# Altium PCB ITCoffeeOne_Lite_V4.02.PcbDoc
Units mm, origin at the board's own origin, x right, y up, seen from the top; angles counter-clockwise.
Board outline 45 x 100 mm, 2 copper layers (Top, Bottom); 43 components, 45 nets, 146 pads, 19 vias.
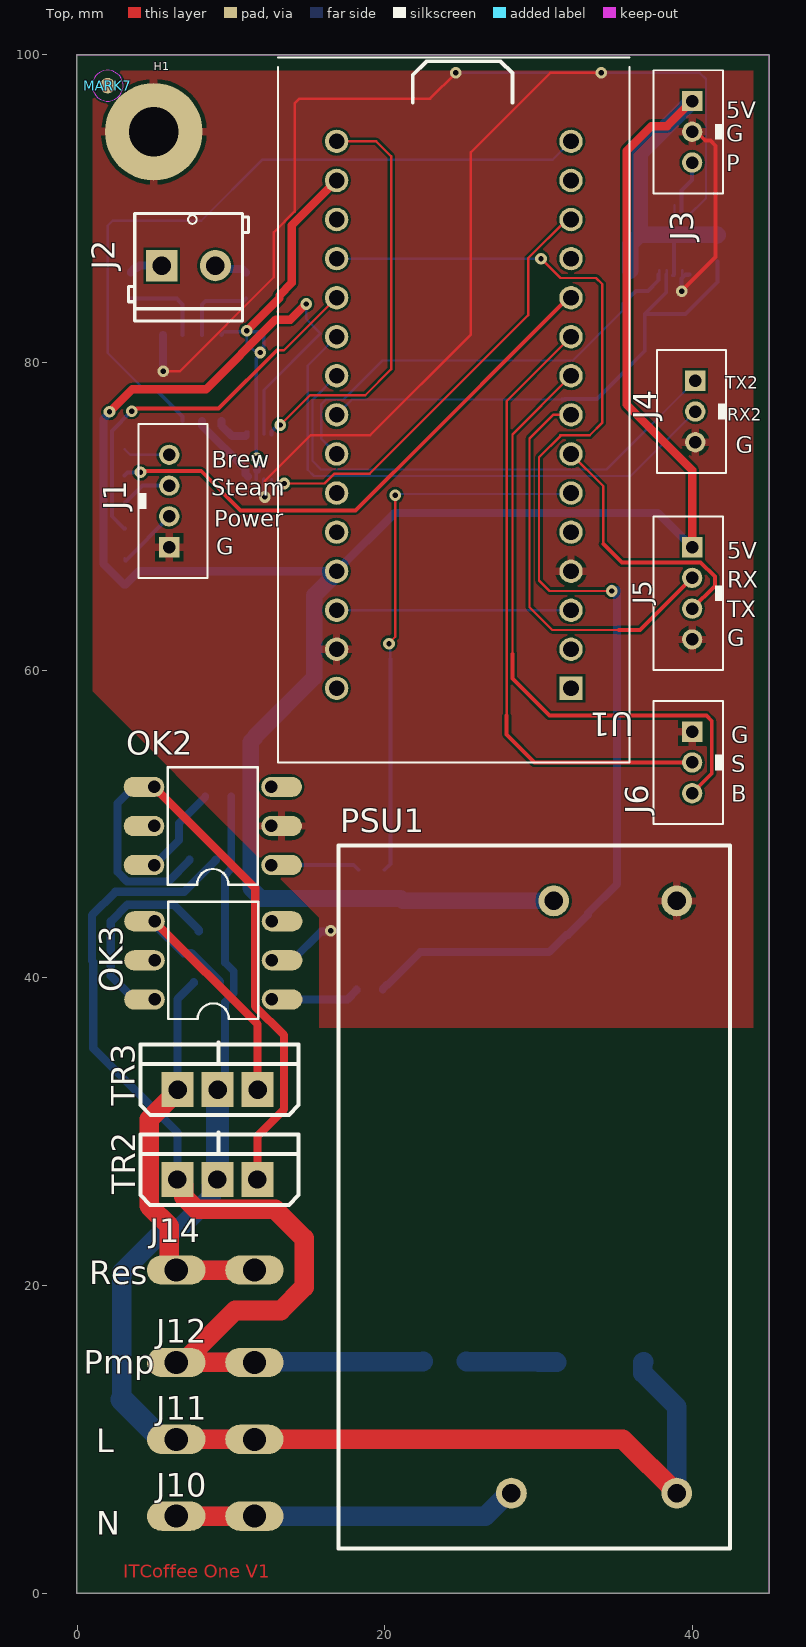
[diagram p0: Top view]
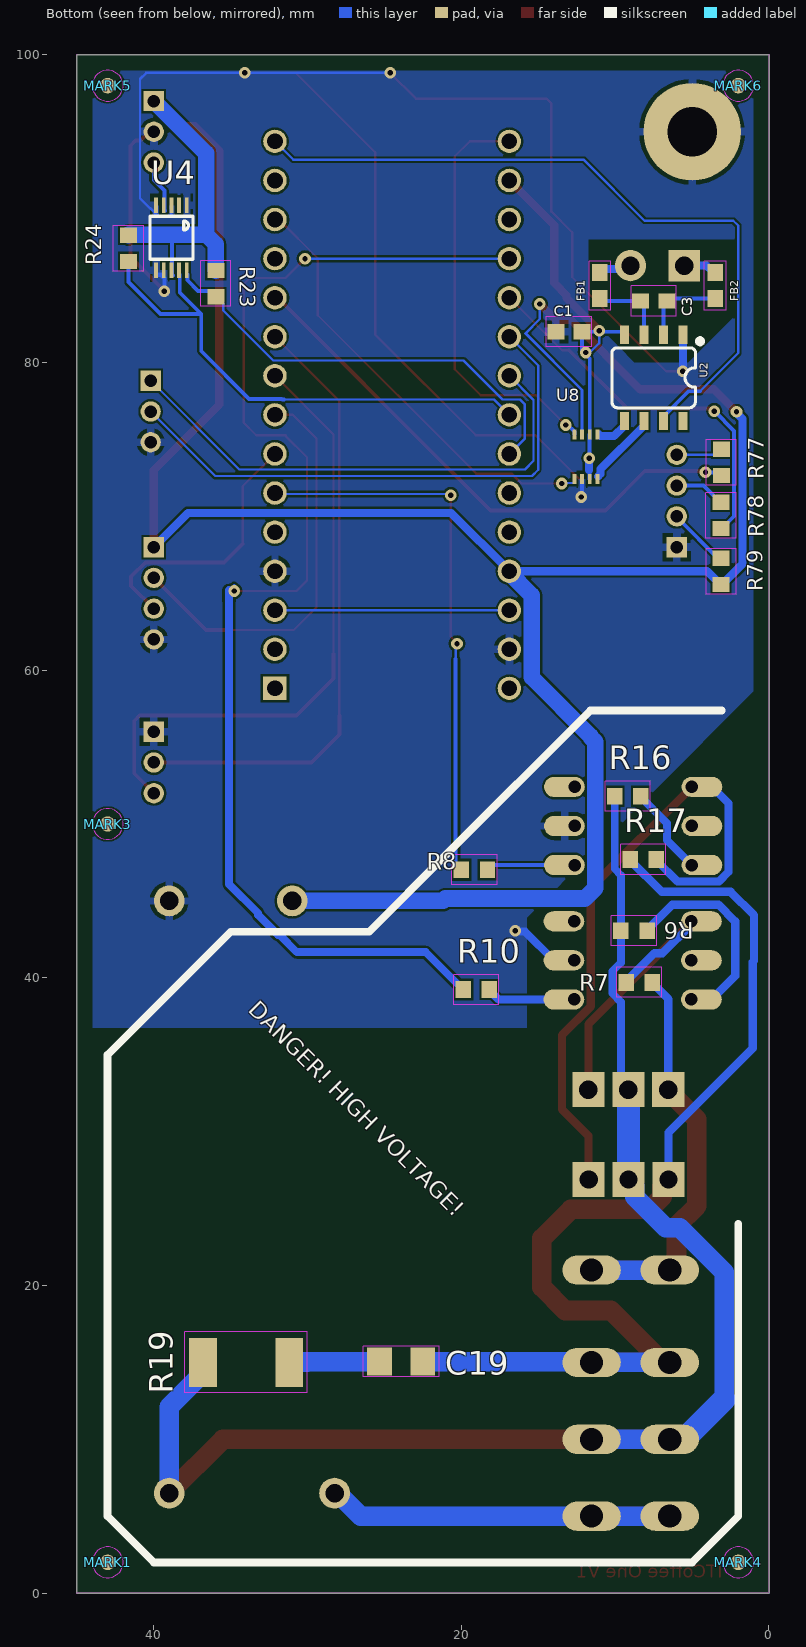
[diagram p1: Bottom view, seen from below]

## Layer stack, top to bottom
Top Solder: solder mask 0.0102, Solder Resist, Dk 3.5
Top: signal copper 0.035
Dielectric 1: dielectric 0.32, FR-4, Dk 4.8
Bottom: signal copper 0.035
Bottom Solder: solder mask 0.0102, Solder Resist, Dk 3.5

## Board outline
-0.009,100 -0.009,0 44.991,0 44.991,100

## Design rules (kind name [scope] priority, off if disabled: settings)
BoardOutlineClearance mdCopperDimension [All] p1: gap=0.254 ignorepadtopadclearanceinfootprint=FALSE except(0: Arc-SplitContinuation Track-SplitContinuation SMDPad-SplitContinuation THPad-SplitContinuation Via-SplitContinuation Fill-SplitContinuation Poly-SplitContinuation Region-SplitContinuation Text-SplitContinuation; 1.016: Poly-OutlineEdge Poly-CavityEdge Poly-CutoutEdge Poly-SplitBarrior)
Clearance [All] p1: gap=0.152 ignorepadtopadclearanceinfootprint=FALSE except(0.025: Arc-Text Track-Text SMDPad-Text THPad-Text Via-Text Fill-Text Poly-Text Region-Text Text-Text)
HoleSize [All] p1: absolutevalues=TRUE maxlimit=2540 minlimit=0.35 maxpercent=80.000 minpercent=20.000
HoleToHoleClearance mdDrill [All] p1: gap=0.152 allowstackedmicrovias=TRUE
MinimumSolderMaskSliver [All] p1 off: minsoldermaskwidth=0.254
PasteMaskExpansion Expansion_SMDPaste_OFF [InPadClass('SMDPaste_OFF')] p1: expansion=0
PasteMaskExpansion mlMinCreamFrame [All] p2: expansion=0
PolygonConnect PolygonConnect_For_PolygonThermal_ON_Width200000_Gap100000 [InPolygonClass('PolygonThermal_ON_Width200000_Gap100000') vs Not IsVia] p1: connectstyle=Relief reliefconductorwidth=0.508 reliefentries=4 polygonreliefangle="90 Angle" airgapwidth=0.254
PolygonConnect ThermalVias [IsVia] p2: connectstyle=Direct reliefconductorwidth=0.254 reliefentries=4 polygonreliefangle="90 Angle" airgapwidth=0.254
PolygonConnect [All] p3: connectstyle=Relief reliefconductorwidth=0.254 reliefentries=4 polygonreliefangle="90 Angle" airgapwidth=0.254
RoutingVias [All] p1: holewidth=0.35 width=0.756 viastyle="Through Hole" minholewidth=0.35 minwidth=0.756 maxholewidth=2.54 maxwidth=2.54
SolderMaskExpansion Expansion_SMDSolder_OFF [InPadClass('SMDSolder_OFF')] p1: expansion=0 istentingtop=FALSE
SolderMaskExpansion mlMinStopFrame [All] p2: expansion=0.102 istentingtop=FALSE
Width [All] p1: maxlimit=254 minlimit=0.152 preferedwidth=0.152
26 further rules are at their usual default settings.

## Classes and differential pairs
component class ITCoffeeOne_Lite_V4_1: C1 C19 H1 J10 J11 J12 J14 MARK3 MARK4 MARK6 MARK7 OK2 OK3 PSU1 R6 R7 R8 R10 R16 R17 R19 TR2 TR3
component class ITCoffeeOne_Lite_V4_0: C3 FB1 FB2 J1 J2 J3 J4 J5 J6 MARK1 MARK5 R23 R24 R77 R78 R79 U1 U2 U4 U8
polygon class PolygonThermal_ON_Width200000_Gap100000: Polygon_1_Net_GND Polygon_2_Net_GND
pad class SMDSolder_OFF: MARK1-1 MARK3-1 MARK4-1 MARK5-1 MARK6-1 MARK7-1
pad class SMDPaste_OFF: MARK1-1 MARK3-1 MARK4-1 MARK5-1 MARK6-1 MARK7-1

## Components (designator, comment, footprint, x,y, rotation, side; value= is the part's Value field where it differs from the comment)
C1 "0.1uF" C0603 12.991,82 r0 bottom
C3 "0.01uF" C0603 7.491,84 r0 bottom
C19 "10nF" C1206 23.916,15.06 r0 bottom
FB1 "470Ω" 0603 10.991,85 r270 bottom
FB2 "470Ω" 0603 3.491,85 r270 bottom
H1 "STANDOFF_ELECTRICAL" STANDOFF-ELECTRICAL 4.991,95 r0 top
J1 "4PIN B4B-PH-K-S" B4B-PH-K-S 5.991,71 r270 top
J2 "screwterminal 3.5mm -2" SCREWTERMINAL-3.5MM-2-NS 5.5,86.3 r0 top
J3 "3PIN" B3B-PH-K-S 39.991,95 r90 top
J4 "3PIN" B3B-PH-K-S 40.195,76.815 r90 top
J5 "4PIN B4B-PH-K-S" B4B-PH-K-S 39.991,65 r90 top
J6 "3PIN" B3B-PH-K-S 39.991,54 r90 top
J10 "PIN262409-1" 62409-1 8.991,5 r0 top
J11 "PIN262409-1" 62409-1 8.991,10 r0 top
J12 "PIN262409-1" 62409-1 8.991,15 r0 top
J14 "PIN262409-1" 62409-1 8.991,21 r180 top
MARK1 "FIDUCIAL" FIDUCIAL_1MM 42.991,2 r180 bottom
MARK3 "FIDUCIAL" FIDUCIAL_1MM 42.991,50 r180 bottom
MARK4 "FIDUCIAL" FIDUCIAL_1MM 1.991,2 r180 bottom
MARK5 "FIDUCIAL" FIDUCIAL_1MM 42.991,98 r180 bottom
MARK6 "FIDUCIAL" FIDUCIAL_1MM 1.991,98 r180 bottom
MARK7 "FIDUCIAL" FIDUCIAL_1MM 1.991,98 r0 top
OK2 "MOC3061" DIL06O 8.824,49.87 r90 top
OK3 "MOC3061" DIL06O 8.857,41.132 r90 top
PSU1 "" IRM-10 38.991,45 r270 top locked
R6 "360" R0603 8.772,43.061 r0 bottom
R7 "360" R0603 8.432,39.708 r180 bottom
R8 "470" R0603 19.146,47.024 r180 bottom
R10 "470" R0603 19.023,39.232 r180 bottom
R16 "360" R0603 9.184,51.803 r0 bottom
R17 "360" R0603 8.167,47.688 r180 bottom
R19 "220" R2512 33.991,15 r0 bottom
R23 "10K" R0603 35.96,85.132 r270 bottom
R24 "10K" R0603 41.639,87.42 r270 bottom
R77 "4.7k" R0603 3.094,73.509 r270 bottom
R78 "4.7K" R0603 3.112,70.057 r270 bottom
R79 "4.7K" R0603 3.108,66.419 r270 bottom
TR2 "bta16," TO-220AB 6.529,26.889 r0 top
TR3 "bta16," TO-220AB 6.537,32.738 r0 top
U1 "NANO" "ARDUINO NANO" 32.114,58.816 r180 top
U2 "MAX31855K" SO08 7.491,79 r0 bottom
U4 "ADC_ADS1015 msop10" MSOP10 38.845,88.112 r0 bottom
U8 "TXS0102" VFSOP-8 11.901,73.862 r180 bottom

## Footprints (in the part's own frame and the unit in brackets; to place one, negate y for a bottom-side part, rotate by r counter-clockwise, add the part's x,y. Pads: shape width x height; smd on the part's side, far side on the other; paste and mask are expansions set on the pad)
0603 [mm]
  rect 1.1x1 smd: 1(-0.85,0) 2(0.85,0)
  Top keep-out lines w0.051: 1.6,0.7 1.6,-0.7 -1.6,-0.7 -1.6,0.7 1.6,0.7
  body extent -1.63,-0.73 1.63,0.73, height 3.81
62409-1 [mm]
  oval 3.8x1.9 / inner round 0 / far side oval 3.8x1.9 hole 1.5: A1(-2.54,0) A2(2.54,0)
  body extent -4.45,-0.96 4.45,0.96, height 3.81
"ARDUINO NANO" [mil]
  rect 60x60 / inner round 0 / far side rect 60x60 hole 40: 1(0,0)
  round 60 / inner round 0 / far side round 60 hole 40: 2(0,-100) 3(0,-200) 4(0,-300) 5(0,-400) 6(0,-500) 7(0,-600) 8(0,-700) 9(0,-800) 10(0,-900) 11(0,-1000) 12(0,-1100) 13(0,-1200) 14(0,-1300) 15(0,-1400) 16(600,-1400) 17(600,-1300) 18(600,-1200) 19(600,-1100) 20(600,-1000) 21(600,-900) 22(600,-800) 23(600,-700) 24(600,-600) 25(600,-500) 26(600,-400) 27(600,-300) 28(600,-200) 29(600,-100) 30(600,0)
  silkscreen extent -150,-1614 750,190, body extent -30,-1430 630,28, height 50
B3B-PH-K-S [mil]
  rect 52x52 / inner round 0 / far side rect 52x52 hole 32: 1(78.74,0)
  round 52 / inner round 0 / far side round 52 hole 32: 2(0,0) 3(-78.74,0)
  silkscreen extent -157,-79 157,98, body extent -105,-26 103,26, height 50
B4B-PH-K-S [mil]
  rect 52x52 / inner round 0 / far side rect 52x52 hole 32: 1(118.11,0)
  round 52 / inner round 0 / far side round 52 hole 32: 2(39.37,0) 3(-39.37,0) 4(-118.11,0)
  silkscreen extent -197,-79 197,98, body extent -144,-26 143,26, height 50
C0603 [mm]
  rect 1.1x1 smd: 1(-0.85,0) 2(0.85,0)
  Top keep-out lines w0.051: -1.473,0.983 -1.473,-0.983 1.473,-0.983 1.473,0.983 -1.473,0.983
  body extent -1.5,-1.01 1.5,1.01, height 3.81
C1206 [mm]
  rect 1.6x1.8 smd: 1(-1.4,0) 2(1.4,0)
  Top keep-out lines w0.051: -2.473,0.983 -2.473,-0.983 2.473,-0.983 2.473,0.983 -2.473,0.983
  body extent -2.5,-1.01 2.5,1.01, height 3.81
DIL06O [mil]
  oval 52x104 / inner round 0 / far side oval 52x104 hole 32 copper offset 0,-26: 1(-100,-150) 2(0,-150) 3(100,-150)
  oval 52x104 / inner round 0 / far side oval 52x104 hole 32 copper offset 0,26: 4(100,150) 5(0,150) 6(-100,150)
  silkscreen extent -150,-115 150,115, body extent -126,-228 126,228, height 50
FIDUCIAL_1MM [mm]
  rrect100% 1x1 smd paste+0 mask+0: 1(0,0)
  Top keep-out region: -1,0 -1,-0.098 -0.962,-0.292 -0.886,-0.474 -0.777,-0.637 -0.637,-0.777 -0.474,-0.886 -0.292,-0.962 -0.098,-1 0,-1 0.098,-1 0.292,-0.962 0.474,-0.886 0.637,-0.777 0.777,-0.637 0.886,-0.474 0.962,-0.292 1,-0.098 1,0 1,0.098 0.962,0.292 0.886,0.474 0.777,0.637 0.637,0.777 0.474,0.886 0.292,0.962 0.098,1 0,1 -0.098,1 -0.292,0.962 -0.474,0.886 -0.637,0.777 -0.777,0.637 -0.886,0.474 -0.962,0.292 -1,0.098 -1,0 -1,0
  body extent -1,-1 1,1, height 3.81
IRM-10 [mm]
  round 2 hole 1.2: +V(0,-8) -V(0,0) AC/L(38.5,0) AC/N(38.5,-10.75)
  silkscreen extent -3.6,-22 42.1,3.45
MSOP10 [mm]
  rect 0.25x1 smd: 1(-1,-2.113) 2(-0.5,-2.113) 3(0,-2.113) 4(0.5,-2.113) 5(1,-2.113) 6(1,2.113) 7(0.5,2.113) 8(0,2.113) 9(-0.5,2.113) 10(-1,2.113)
  silkscreen extent -1.4,-1.4 1.4,1.4, body extent -1.12,-2.61 1.12,2.61, height 1.27
R0603 [mm]
  rect 1x1.1 smd: 1(-0.85,0) 2(0.85,0)
  Top keep-out lines w0.051: -1.473,0.983 1.473,0.983 1.473,-0.983 -1.473,-0.983 -1.473,0.983
  body extent -1.5,-1.01 1.5,1.01, height 3.81
R2512 [mm]
  rect 1.8x3.2 smd: 1(-2.8,0) 2(2.8,0)
  Top keep-out lines w0.051: -3.973,1.983 -3.973,-1.983 3.973,-1.983 3.973,1.983 -3.973,1.983
  body extent -4,-2.01 4,2.01, height 3.81
SCREWTERMINAL-3.5MM-2-NS [mil]
  rect 80x80 / inner round 0 / far side rect 80x80 hole 47.24: 1(0,0)
  round 80 / inner round 0 / far side round 80 hole 47.24: 2(137.8,0)
  silkscreen extent -85,-142 222,134, body extent -89,-146 227,138, height 150
SO08 [mm]
  rect 0.6x1.2 smd: 1(-1.905,-2.8) 2(-0.635,-2.8) 3(0.635,-2.8) 4(1.905,-2.8) 5(1.905,2.8) 6(0.635,2.8) 7(-0.635,2.8) 8(-1.905,2.8)
  silkscreen extent -3.33,-2.7 2.72,1.95, body extent -2.2,-3.4 2.2,3.4, height 1.27
STANDOFF-ELECTRICAL [mm]
  round 6.35 / inner round 0 / far side round 6.35 hole 3.2: P1(0,0)
  body extent -3.18,-3.18 3.18,3.18, height 1.27
TO-220AB [mm]
  rect 2.1x2.3 hole 1.2: 1(0,0) 2(2.6,0) 3(5.2,0)
  silkscreen extent -2.41,-1.65 7.87,3.05
VFSOP-8 [mm]
  rect 0.25x0.65 smd: P$1(-0.75,-1.45) P$2(-0.25,-1.45) P$3(0.25,-1.45) P$4(0.75,-1.45) P$5(0.75,1.45) P$6(0.25,1.45) P$7(-0.25,1.45) P$8(-0.75,1.45)
  body extent -0.88,-1.78 0.88,1.78, height 1.27

## Part data
C1: library part C-USC0603, "CAPACITOR, American symbol", LCSC=C1591, DeviceName=C0603, DeviceSetName=C-US, GateName_1=G$1, LibraryName=rcl, POPULARITY=37, SPICEPREFIX=C, SymbolName_1=C-US
C3: library part C-USC0603, "CAPACITOR, American symbol", LCSC=C100042, DeviceName=C0603, DeviceSetName=C-US, GateName_1=G$1, LibraryName=rcl, POPULARITY=37, SPICEPREFIX=C, SymbolName_1=C-US
C19: library part C-USC1206, "CAPACITOR, American symbol", LCSC=C107192, DeviceName=C1206, DeviceSetName=C-US, GateName_1=G$1, LibraryName=rcl, POPULARITY=24, SPICEPREFIX=C, SymbolName_1=C-US
FB1 FB2: library part FERRITE_BEAD-0603-470Ω-100MHZ-1A-200MILIΩ, "Ferrite Bead (blocks, cores, rings, chokes, etc.)    Inductor with layers of ferrite used to suppress high frequencies. Often used to isolate high frequency noise.   SparkFun Products:  IOIO-OTG - V2.2  SparkFun SAMD21 Mini Breakout  SparkFun 6 Degrees of Freedom Breakout - LSM6DS3  SparkFun SAMD21 Dev Breakout", LCSC=C883591, DeviceName=-0603-470Ω-100MHZ-1A-200MILIΩ, DeviceSetName=FERRITE_BEAD, GateName_1=G$1, LibraryName=SparkFun-Coils, PROD_ID=NDUC-12579, SymbolName_1=FERRITE_BEAD
H1: "Stand Off    Drill holes with an electrical connection. For example, use these to ground your board to a chassis. Example SparkFun Products  Screw - Phillips Head (1/4\", 4-40, 10 pack) (PRT-10453)  Screw - Phillips Head (1/2\", 4-40, 10 pack) (PRT-10452)  Screw - Phillips Head (3/4\", 4-40, 10 pack) (PRT-10451)  Screw - Phillips Head (1\", 4-40, 10 pack) (PRT-10450)", DeviceSetName=STANDOFF_ELECTRICAL, GateName_1=G$1, LibraryName=SparkFun-Hardware, SymbolName_1=STANDOFF_ELECTRICAL
J1 J5: library part 4PIN, LCSC=C131334, DeviceSetName=4PIN, GateName_1=G$1, LibraryName=jst_eph, SymbolName_1=4PIN
J2: library part CONN_023.5MM-NO_SILK, "Multi connection point. Often used as Generic Header-pin footprint for 0.1 inch spaced/style header connections    On any of the 0.1 inch spaced packages, you can populate with these:  Break Away Headers - Straight (PRT-00116)   Break Away Male Headers - Right Angle (PRT-00553)   Female Headers (PRT-00115)   Break Away Headers - Machine Pin (PRT-00117)   Break Away Female Headers - Swiss Machine Pin (PRT-00743)        For SCREWTERMINALS and SPRING TERMINALS visit here:  Screw Terimnals on SparkFun.com (5mm/3.5mm/2.54mm spacing)       This device is also useful as a general connection point to wire up your design to another part of your project. Our various solder wires solder well into these plated through hole pads.  Hook-Up Wire - Assortment (Stranded, 22 AWG) (PRT-11375)   Hook-Up Wire - Assortment (Solid Core, 22 AWG) (PRT-11367)   View the entire wire category on our website here          Special notes: Molex polarized connector foot print use with: PRT-08233 with associated crimp pins and housings.  2.54_SCREWTERM for use with  PRT-10571.  3.5mm Screw Terminal footprints for  PRT-08084  5mm Screw Terminal footprints for use with PRT-08432", LCSC=C474892, DeviceName=3.5MM-NO_SILK, DeviceSetName=CONN_02, GateName_1=G$1, LibraryName=SparkFun-Connectors, PROD_ID=CONN-08399, SymbolName_1=CONN_02
J3: LCSC=C131339, DeviceSetName=3PIN, GateName_1=G$1, LibraryName=jst_eph, SymbolName_1=3PIN
J4 J6: "jst connector，3pin,2.0mm", LCSC=C131339, DeviceSetName=3PIN, GateName_1=G$1, LibraryName=jst_eph, SymbolName_1=3PIN
J10 J11 J12 J14: "Flachstecker Typ Tyco/Electronics/AMP TAB, FASTON   Printed Circuit Board Tabs Source: http://www.buerklin.com, http://catalog.tycoelectronics.com", LCSC=C86495, MPN=MPN, DeviceName=62409-1, DeviceSetName=PIN2, GateName_1=-1, LibraryName=con-faston, MF=MF, OC_FARNELL=unknown, OC_NEWARK=unknown, SymbolName_1=PIN
MARK1 MARK3 MARK4 MARK5 MARK6 MARK7: "For use by pick and place machines to calibrate the vision/machine, 1mm    By microbuilder.eu", DeviceSetName=FIDUCIAL, GateName_1=G$1, LibraryName=adafruit, SymbolName_1=DOT
OK2 OK3: library part MOC3021MDIL06O, "zero cross OPTOISOLATORS TRIAC DRIVER OUTPUT", LCSC=C5242, DeviceName=DIL06O, DeviceSetName=MOC3021M, GateName_1=G$1, LibraryName=discrete, SymbolName_1=OK-TR
PSU1: library part IRM-10-5, "MEAN WELL IRM-10-5 5V 10W Output Switching Power Supply", LCSC=C2857903, DeviceSetName=IRM-10-5, GateName_1=G$1, LibraryName=discrete, SPICEPREFIX=E, SymbolName_1=PSU
R6 R7 R8 R10 R16 R17: library part R-US_R0603, "RESISTOR, American symbol", LCSC=C114669, DeviceName=R0603, DeviceSetName=R-US_, GateName_1=G$1, LibraryName=rcl, POPULARITY=77, SPICEPREFIX=R, SymbolName_1=R-US
R19: library part R-US_R2512, "RESISTOR, American symbol", LCSC=C877859, DeviceName=R2512, DeviceSetName=R-US_, GateName_1=G$1, LibraryName=rcl, POPULARITY=0, SPICEPREFIX=R, SymbolName_1=R-US
R23 R24 R77 R78 R79: library part R-US_R0603, "RESISTOR, American symbol", LCSC=C98220, DeviceName=R0603, DeviceSetName=R-US_, GateName_1=G$1, LibraryName=rcl, POPULARITY=77, SPICEPREFIX=R, SymbolName_1=R-US
TR2 TR3: library part BTA, "Triacs 16Amp 600 Volt", LCSC=C71218, DeviceName=TO-220AB, DeviceSetName=BTA16, GateName_1=G$1, LibraryName=discrete, SymbolName_1=TRIAC
U1: library part "arduino nano", "ARDUINO NANO", DeviceSetName=NANO, GateName_1=G$1, LibraryName=discrete, SymbolName_1=NANO
U2: "Cold-Junction-Compensated K-Thermocoupleto-Digital Converter (-270掳C to +1800掳C)    The MAX31855K performs cold-junction compensation and digitizes the signal from a type-K thermocouple. The data is output in a 14-bit resolution, SPI鈩?compatible, read-only format. This converter resolves temperatures to 0.25掳C, allows readings as high as +1800掳C and as low as -270掳C, and exhibits thermocouple accuracy of 卤2掳C for temperatures ranging from -200掳C to +700掳C for K-type thermocouples.   Datasheet SparkFun Products  SparkFun Thermocouple Breakout - MAX31855K (SEN-13266)", LCSC=C52028, DeviceSetName=MAX31855K, GateName_1=G$1, LibraryName=SparkFun-IC-Conversion, PROD_ID=IC-12578, SymbolName_1=MAX31855K
U4: library part ADC_ADS1015, "ADS1015 - 12-bit 4-Channel I2C ADC with Internal PGA    VDD: 2.0-5.5V  Sampling Rate: 3.3ksps  Gain Settings: 2/3, 1, 2, 4, 8, 16  I2C Address: ADDR low = 1001000x, ADDR high = 1001001x       Internal Comparator   The ADS1015 includes an internal comparator that can be set to output a high-level on ALERT when the conversion results exceeeds a pre-defined upper level, and will deassert itself when the level falls below a pre-defined lower threshold level. It can also be set to windowed mode where the ALERT pin will be asserted if the data exceeds the upper threshold or falls below the lower threshold.", LCSC=C193969, Temp=Temp:, 2.0-5.5V=2.0-5.5V, 12-BitI虏CADC="12-Bit I虏C ADC", -40-125掳C=-40-125掳C, ADS1015=ADS1015, DeviceSetName=ADC_ADS1015, GateName_1=G$1, LibraryName=microbuilder, SymbolName_1=ADS1015, VDD=VDD:
U8: "2-Bit Bi-Directional Level Shifter (I2C, etc.)   Designed for I2C devices and has internal pullups.  Not to be confused with TXB010x series.   1.2V-3.6V (VCCA) to 1.65V-5.5V (VCCB) bi-directional level shifter with auto direction sensing.    Max data rate - 24Mbps (Push Pull), 2Mbps (Open Drain)       Digikey: 296-21931-1-ND", LCSC=C53434, 1.2-3.6V=1.2-3.6V, 1.65-5.5V=1.65-5.5V, DeviceSetName=TXS0102, GateName_1=G$1, LibraryName=adafruit, SymbolName_1=TXS0102

## Via types
v1: diameter 0.756, hole 0.35, Top to Bottom, 19 vias

## Nets (pads, with @x,y where several pads share a name; then routed paths per layer and width w, separated by ;. In a path a pad name is that pad's centre, name@x,y a point inside that pad or via, vN(x,y) a via of type N, cw(c..) or ccw(c..) an arc to the next point about the centre after c; other vN are vias at no path point)
3V3: C1.1 U1.17 U2.4 U8.P$3 U8.P$6 | length 27.2
  Top w0.54: v1(11.04,82.067) 13.159,84.187 13.159,84.367 13.957,85.165 13.957,88.92 U1.17
  Bottom w0.152: v1(11.04,82.067) 11.04,81.256 11.643,80.653 v1(11.913,80.653)
  Bottom w0.2: v1(11.68,73.778) 11.831,73.778 v1@11.943,73.666
  Bottom w0.254: U2.4 9.396,81.827 9.569,82 C1.1 12.141,80.758 11.992,80.609 v1@11.957,80.609 ; U8.P$3 11.653,72.414 11.653,72.939 11.707,72.993 ; v1(11.68,73.778) 11.653,73.805 11.653,75.31 U8.P$6 11.651,80.255 11.913,80.517 v1(11.913,80.653)
  Bottom w0.508: v1(11.68,73.778) 11.707,73.751 11.707,72.993
5V: J3.1 J5.1 PSU1.+V R23.1 R24.1 R79.2 U1.27 U4.8 U8.P$7 | length 175.4
  Top w0.54: v1(2.11,76.79) 3.582,78.262 8.388,78.262 12.916,82.789 13.88,82.789 v1(14.896,83.805) ; 35.731,81.764 35.731,82.201 ; J5.1 39.991,73.01 35.731,77.27 35.731,82.201 ; J3.1 38.361,95.371 37.336,95.371 35.731,93.765 35.731,82.201
  Bottom w0.152: v1(14.896,83.805) 14.896,82.829 15.831,81.894 ; U4.8@38.808,85.719 38.808,85.674 38.7,85.674 38.7,85.636 38.713,85.623 38.845,85.623 U4.8
  Bottom w0.2: U8.P$7 12.151,78.214 15.831,81.894
  Bottom w0.254: 38.803,88.31 38.808,88.305 U4.8@38.808,85.719
  Bottom w0.54: v1(2.11,76.79) 2.11,76.731 1.715,76.336 1.715,66.912 3.057,65.569 R79.2 3.158,65.569 4.025,66.436 U1.27 20.656,70.219 37.772,70.219 J5.1
  Bottom w1.08: U1.27@16.934,66.376 15.419,64.862 15.419,59.537 11.581,55.699 11.581,55.632 11.281,55.332 11.281,45.842 11.964,45.16 21.027,45.16 21.187,45 PSU1.+V ; R23.1 35.96,86.012 35.96,87.688 36.583,88.31 ; J3.1 36.593,93.602 36.593,88.32 36.583,88.31 ; R24.1 41.639,88.3 41.629,88.31 38.803,88.31 36.583,88.31
AC_N: J10.A1 J10.A2 PSU1.AC/N | length 27.5
  Top w1.27: J10.A1 J10.A2
  Bottom w1.27: J10.A1 J10.A2 26.543,5 28.043,6.5 PSU1.AC/N
AC_P: J11.A1 J11.A2 PSU1.AC/L R6.2 R16.2 R19.2 TR2.2 TR3.2 | length 96.3
  Top w1.27: J11.A1 J11.A2 29.991,10 35.491,10 PSU1.AC/L
  Bottom w0.5: TR3.2 9.622,33.223 9.622,38.429 10.185,38.991 10.185,40.425 9.622,40.987 R6.2 9.622,46.675 10.034,47.087 R16.2
  Bottom w1.27: 2.911,12.59 2.911,20.867 5.784,23.74 6.694,23.74 8.714,25.76 8.714,26.474 TR2.2 ; J11.A1@5.501,10 J11.A1 J11.A2 ; R19.2@36.839,15.048 R19.2 36.791,14.3 38.991,12.1 PSU1.AC/L
  Bottom w1.5: 2.911,12.59 J11.A1@5.501,10 ; TR2.2 9.133,26.893 9.133,32.734 TR3.2
BOOT1: U1.26
brew_led: R77.2 U1.11 | length 35.9
  Top w0.254: v1(4.123,72.86) 4.203,72.94 8.076,72.94 10.624,70.393 18.109,70.393 20.563,72.847 20.591,72.847 31.96,84.216 U1.11
  Bottom w0.254: R77.2 3.294,72.86 v1(4.123,72.86)
brew_switch: J6.3 U1.9 | length 40.6
  Top w0.152: 28.307,61.054 28.307,75.33 U1.9
  Top w0.254: 28.307,61.054 28.307,59.449 30.71,57.047 40.911,57.047 41.263,56.696 41.263,53.272 J6.3
GND: C1.2 H1.P1 J1.1 J3.2 J4.3 J5.4 J6.1 OK2.2 OK3.2 PSU1.-V U1.4 U1.29 U2.1 U4.1 U4.3 U4.5 U4.6 U4.7 U8.P$2 | length 123.9
  Top w0.152: v1(5.601,79.423) 6.673,79.423 12.792,85.542 12.792,88.46 14.145,89.813 14.145,96.837 14.462,97.155 22.952,97.155 v1(24.629,98.831) ; v1(12.196,71.26) 12.196,72.282 15.195,75.281 19.063,75.281 25.605,81.822 25.605,93.67 30.766,98.831 v1(34.079,98.831)
  Top w0.254: v1(39.305,84.641) 41.518,86.855 41.518,94.094 41.175,94.437 40.843,94.437 40.279,95 J3.2
  Bottom w0.152: v1(24.629,98.831) v1(34.079,98.831) 40.478,98.831 40.885,98.425 40.885,91.616 40.885,90.678 39.691,89.484 38.87,89.484 38.845,89.51 U4.3 ; U4.7 39.345,85.623 39.712,85.623 U4.6@39.808,85.719
  Bottom w0.254: U8.P$2 12.151,71.305 v1(12.196,71.26) ; v1(39.305,84.641) 39.305,85.466 39.558,85.719 U4.6@39.808,85.719
  Bottom w0.508: U2.1 5.586,79.543 5.601,79.527 v1(5.601,79.423) ; OK3.2 13.988,41.132 15.86,43.005 16.445,43.005 v1(16.492,43.052)
hotwater_switch: U1.25
I2C1_SCL: R23.2 U1.24 U4.10 | length 29.9
  Bottom w0.152: U1.24 15.866,75.064 15.866,77.279 16.183,77.597 17.314,77.597 19.854,80.137 32.225,80.137 35.487,83.399 35.487,83.859 R23.2@35.86,84.233 ; U4.10@37.808,85.719 37.845,85.719 U4.10
  Bottom w0.254: R23.2@35.86,84.233 35.91,84.233 R23.2 36.333,84.656 37.115,84.656 37.808,85.348 U4.10@37.808,85.719
I2C1_SDA: R24.2 U1.23 U4.9 | length 35
  Bottom w0.152: U1.23 17.874,77.597 31.975,77.597 32.016,77.638 ; U4.9@38.306,85.717 38.345,85.717 U4.9
  Bottom w0.254: 31.539,77.597 31.641,77.597 31.682,77.638 32.016,77.638 33.797,77.638 36.907,80.748 36.907,83.156 ; U4.9@38.306,85.717 38.306,84.555 36.907,83.156 ; R24.2 41.639,85.236 39.559,83.156 36.907,83.156
NetC3_1: C3.1 FB2.2 U2.2 | length 5.5
  Bottom w0.254: FB2.2 6.491,84.15 C3.1 6.856,83.785 U2.2
NetC3_2: C3.2 FB1.2 U2.3 | length 5
  Bottom w0.254: U2.3 8.126,83.785 C3.2 10.841,84 FB1.2
NetC19_2: C19.2 R19.1 | length 7.1
  Bottom w1.27: C19.2 25.346,15.03 31.161,15.03 R19.1 30.018,15
NetFB1_1: FB1.1 J2.2 | length 2.2
  Bottom w0.508: J2.2 9.225,86.075 10.766,86.075 FB1.1
NetFB2_1: FB2.1 J2.1 | length 2.2
  Bottom w0.508: FB2.1 3.491,85.9 3.737,86.146 3.901,86.146 4.055,86.3 J2.1
NetJ1_2: J1.2 R79.1 | length 4.2
  Bottom w0.152: R79.1 3.108,67.142 R79.1@3.137,67.142
  Bottom w0.254: R79.1@3.137,67.142 3.187,67.142 3.211,67.166 5.991,69.946 J1.2
NetJ1_3: J1.3 R78.1 | length 3.3
  Bottom w0.254: R78.1 3.162,70.907 4.255,72 J1.3
NetJ1_4: J1.4 R77.1 | length 3
  Bottom w0.152: R77.1 3.453,74 J1.4
NetJ3_3: J3.3 U4.4 | length 4.1
  Bottom w0.152: U4.4@39.308,89.945 39.308,89.891 39.208,89.891 39.208,89.84 39.345,89.84 U4.4
  Bottom w0.254: U4.4@39.308,89.945 39.308,91.173 39.991,91.855 J3.3
NetOK2_1: OK2.1 R8.2 | length 5.8
  Bottom w0.254: OK2.1 17.99,47.33 R8.2
NetOK2_4: OK2.4 R17.2 TR2.3 | length 42.6
  Top w0.54: OK2.4 11.584,45.84 11.584,38.144 13.453,36.275 13.453,31.453 11.729,29.729 TR2.3
  Bottom w0.508: OK2.4 3.693,52.41 2.626,51.343 2.626,46.888 3.251,46.263 5.942,46.263 7.317,47.638 R17.2
NetOK2_6: OK2.6 R16.1 | length 5.8
  Bottom w0.508: OK2.6 6.629,48.945 6.629,50.048 8.334,51.753 R16.1
NetOK3_1: OK3.1 R10.2 | length 5.8
  Bottom w0.508: OK3.1 17.584,38.592 18.173,39.182 R10.2
NetOK3_4: OK3.4 R7.1 TR3.3 | length 19.7
  Top w0.54: OK3.4 11.737,36.983 TR3.3
  Bottom w0.54: OK3.4 5.047,43.475 6.918,41.605 7.435,41.605 9.282,39.758 R7.1
NetOK3_6: OK3.6 R6.1 | length 14
  Bottom w0.54: OK3.6 3.726,38.592 2.196,40.123 2.196,43.673 3.278,44.755 6.278,44.755 7.923,43.111 R6.1 R6.1@7.923,43.011
NetU2_5: U2.5 U8.P$5 | length 2.8
  Bottom w0.152: 10.955,75.224 10.955,75.489 10.981,75.514 11.151,75.514 U8.P$5
  Bottom w0.508: U2.5 9.396,75.9 10.072,75.224 10.955,75.224
NetU2_6: U2.6 U8.P$4 | length 5.1
  Bottom w0.152: U8.P$4@11.117,72.596 11.117,72.619 11.151,72.619 U8.P$4
  Bottom w0.508: U2.6 8.126,75.9 10.953,73.073 10.953,72.761 U8.P$4@11.117,72.596
NRST: U1.3 U1.28 | length 15.2
  Bottom w0.152: U1.28 U1.3
pump_1_ctl: R8.1 U1.6 | length 36.6
  Top w0.152: v1(20.278,61.723) 20.278,61.769 20.684,62.175 v1(20.684,71.38)
  Bottom w0.152: v1(20.278,61.723) 20.369,61.632 20.369,60.723 20.369,60.334 ; v1(20.684,71.38) 20.752,71.448 32.045,71.448 U1.6
  Bottom w0.254: R8.1 20.369,47.397 20.369,60.723
pump_2_ctl: U1.5
pump_p: C19.1 J12.A1 J12.A2 R17.1 TR2.1 | length 74.9
  Top w0.152: J12.A1@6.078,15.279 6.078,15 J12.A1
  Top w1.27: J12.A1@6.078,15.279 7.182,15.279 10.275,18.373 13.244,18.373 14.769,19.898 14.769,23.058 12.875,24.951 7.753,24.951 6.944,25.76 6.944,26.474 TR2.1 ; J12.A1 J12.A2
  Bottom w0.54: TR2.1 6.529,29.948 1.047,35.43 1.047,41.028 0.969,41.106 0.969,44.07 2.486,45.587 6.965,45.587 9.016,47.638 R17.1
  Bottom w1.27: J12.A1 J12.A2 11.561,15.03 22.486,15.03 C19.1
resistor_p: J14.A1 J14.A2 R7.2 TR3.1 | length 31
  Top w1.27: TR3.1 6.537,32.638 4.692,30.793 4.692,25.172 6.009,23.855 6.009,21.291 6.3,21 J14.A2 J14.A1
  Bottom w0.54: TR3.1 6.537,38.612 7.583,39.658 R7.2
  Bottom w1.27: J14.A2 J14.A1 J14.A1@11.579,20.952
SPI1_CS: U1.13 U8.P$1 | length 29
  Top w0.152: v1(13.478,72.136) 16.092,72.136 16.735,72.779 19.033,72.779 29.327,83.074 29.327,86.779 31.845,89.296 U1.13
  Bottom w0.152: U8.P$1 12.651,72.212 12.7,72.164 13.451,72.164 v1(13.478,72.136)
SPI1_MISO: U1.15 U2.7 | length 47.5
  Bottom w0.152: 4.487,78.13 1.997,80.62 1.997,88.9 2.315,89.218 8.081,89.218 12.056,93.193 30.93,93.193 U1.15
  Bottom w0.254: 4.487,78.13 5.225,78.13 6.856,76.5 U2.7
SPI1_SCK: U1.16 U8.P$8 | length 27.4
  Top w0.152: v1(13.206,75.939) 15.144,77.878 18.737,77.878 20.42,79.56 20.42,93.412 19.455,94.376 U1.16
  Bottom w0.254: U8.P$8 12.651,75.508 13.082,75.939 v1(13.206,75.939)
ssr_1_ctl: R10.1 U1.19 | length 83.1
  Top w0.152: v1(30.163,86.756) 31.423,85.496 33.747,85.496 34.154,85.09 34.154,76.098 33.328,75.273 31.423,75.273 31.423,75.225 30.035,73.836 30.035,65.822 30.706,65.151 v1(34.77,65.151)
  Bottom w0.152: U1.19 v1(30.163,86.756) ; v1(34.77,65.151) v1@34.77,65.521 ; v1@34.77,65.227 34.808,65.189 v1@35.102,65.189
  Bottom w0.508: R10.1 19.873,39.282 20.119,39.528 20.169,39.528 22.311,41.67 30.688,41.67 31.799,42.781 31.91,42.781 33.21,44.081 33.21,44.192 35.102,46.083 35.102,64.454
  Bottom w0.54: 35.102,64.454 v1@35.102,65.189
ssr_2_ctl: U1.12
steam_led: R78.2 U1.20 | length 24.9
  Top w0.152: 12.992,80.801 13.458,80.801 U1.20
  Top w0.254: v1(3.552,76.843) 3.702,76.843 3.874,77.014 9.205,77.014 12.992,80.801
  Bottom w0.254: R78.2 3.062,69.208 2.264,70.005 2.264,75.555 v1(3.552,76.843)
steam_switch: J6.2 U1.10 | length 40.6
  Top w0.152: 27.931,56.817 27.931,77.494 U1.10
  Top w0.254: 27.931,57.041 27.931,56.817 27.931,55.815 29.746,54 J6.2
UART_2_RX: J4.2 U1.21 | length 37.8
  Bottom w0.152: U1.21 15.002,79.805 15.002,73.025 15.409,72.619 32.752,72.619 ; 31.493,72.619 32.752,72.619 ; J4.2 35.998,72.619 32.752,72.619
UART_2_TX: J4.1 U1.22 | length 35.5
  Bottom w0.152: U1.22 15.307,77.57 15.307,73.609 15.866,73.05 32.693,73.05 ; 30.915,73.05 32.693,73.05 ; J4.1 34.43,73.05 32.693,73.05
UART_HMI_RX: J5.2 U1.8 | length 27.2
  Top w0.152: 31.649,62.611 31.372,62.611 ; U1.8 30.949,76.596 29.417,75.065 29.417,64.087 30.894,62.611 31.372,62.611 ; 35.233,62.611 31.372,62.611
  Top w0.254: 35.233,62.611 36.602,62.611 J5.2
UART_HMI_TX: J5.3 U1.7 | length 17.5
  Top w0.152: U1.7 34.217,71.953 34.217,68.198
  Top w0.254: 34.217,68.198 35.416,66.998 40.542,66.998 41.463,66.077 41.463,65.473 J5.3
valve_ctl: U1.14
pads on no net: MARK1.1 MARK3.1 MARK4.1 MARK5.1 MARK6.1 MARK7.1 OK2.3 OK2.5 OK3.3 OK3.5 U1.1 U1.2 U1.18 U1.30 U2.8 U4.2

## Polygon pours and split planes (outlines as drawn)
GND on Top "Polygon_1_Net_GND" (solid, remove dead copper, pour order 1): -0.263,100.254 45.245,100.254 45.245,36.746 15.737,36.746 15.737,43.895 -0.263,59.895
GND on Bottom "Polygon_2_Net_GND" (solid, remove dead copper, pour order 0): -0.263,100.254 45.245,100.254 45.245,36.746 15.737,36.746 15.737,43.895 -0.263,59.895

## Keep-outs
Keep-Out Layer:
  the board outline again, w0

## Other copper
Top:
  pour cut-out net GND: 3.991,88 10.491,88 10.491,84.7 3.991,84.7 3.991,88
  text "ITCoffee One V1" at 2.991,1 h0.86
Bottom:
  pour cut-out: 2.241,88 11.741,88 11.741,83 8.741,80 5.241,80 2.241,83 2.241,88

## Silkscreen, mask and mechanical layers (free items; w line width, h text height)
Top Overlay:
  text "5V" at 42.195,95.89 h1.08
  text "G" at 42.209,94.343 h1.08
  text "P" at 42.209,92.438 h1.08
  text "TX2" at 42.132,78.308 h0.8
  text "RX2" at 42.284,76.217 h0.8
  text "G" at 42.817,74.088 h1.08
  text "Brew" at 8.772,73.162 h1.08
  text "Steam" at 8.718,71.329 h1.08
  text "Power" at 8.931,69.336 h1.08
  text "G" at 9.064,67.502 h1.08
  text "5V" at 42.282,67.256 h1.08
  text "RX" at 42.282,65.351 h1.08
  text "TX" at 42.282,63.446 h1.08
  text "G" at 42.282,61.541 h1.08
  text "G" at 42.536,55.254 h1.08
  text "S" at 42.536,53.349 h1.08
  text "B" at 42.536,51.444 h1.08
  text "Res" at 0.808,20.073 h1.51
  text "Pmp" at 0.422,14.263 h1.51
  text "L" at 1.261,9.144 h1.51
  text "N" at 1.261,3.81 h1.51
Bottom Overlay:
  lines w0.508: 1.991,24 1.991,5 4.991,2 39.991,2 42.991,5 42.991,35 34.991,43 25.991,43 20.991,48 11.621,57.37 3.07,57.37
  text "DANGER! HIGH VOLTAGE!" at 33.9,37.854 h1.08 r45
Dimension:
  the board outline again, w0
tPlace:
  text "<=" at 7.856,82.961 h1.08 r90
  text "-  +" at 5.071,80.01 h1.51
  text "DANGER! HIGH VOLTAGE!" at 2.395,24.384 h1.08 r90
bPlace:
  lines w0.254: -0.009,0.03 44.903,0.03 44.903,100 -0.009,100 -0.009,0.03